# Altium PCB Filter-SK.PcbDoc
Units mm, origin at the board's own origin, x right, y up, seen from the top; angles counter-clockwise.
Board outline 84 x 44 mm, 4 copper layers (Top Layer, VCC, GND, Bottom Layer), stack 1.62 mm thick; 42 components, 20 nets, 135 pads, 150 vias.
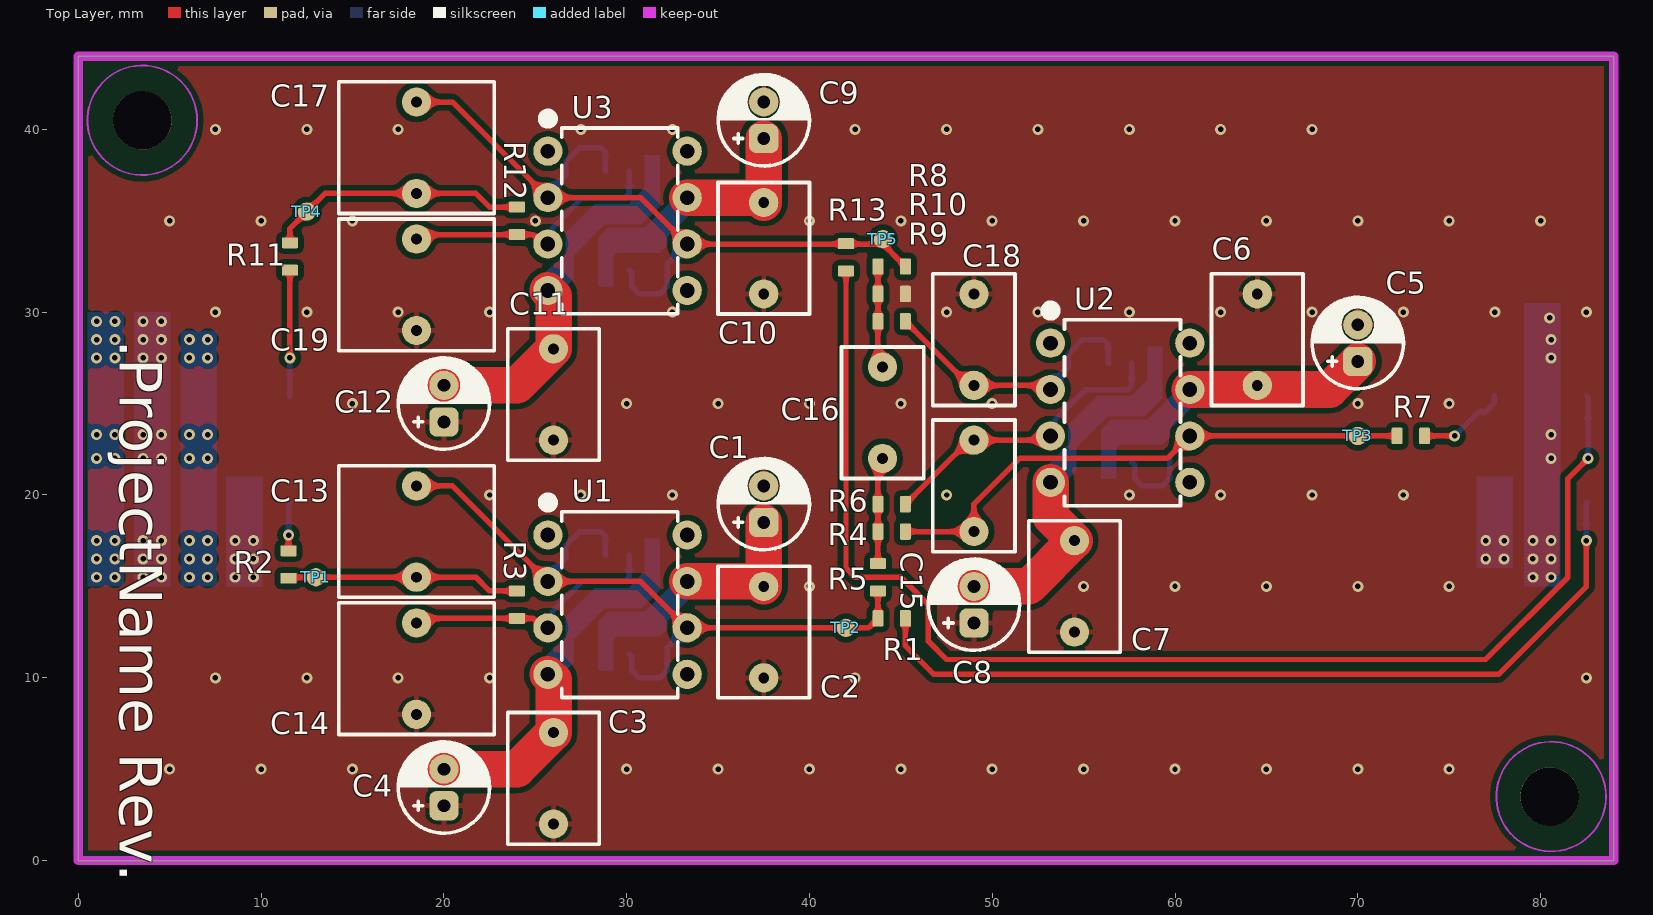
[diagram p0: Top Layer view]
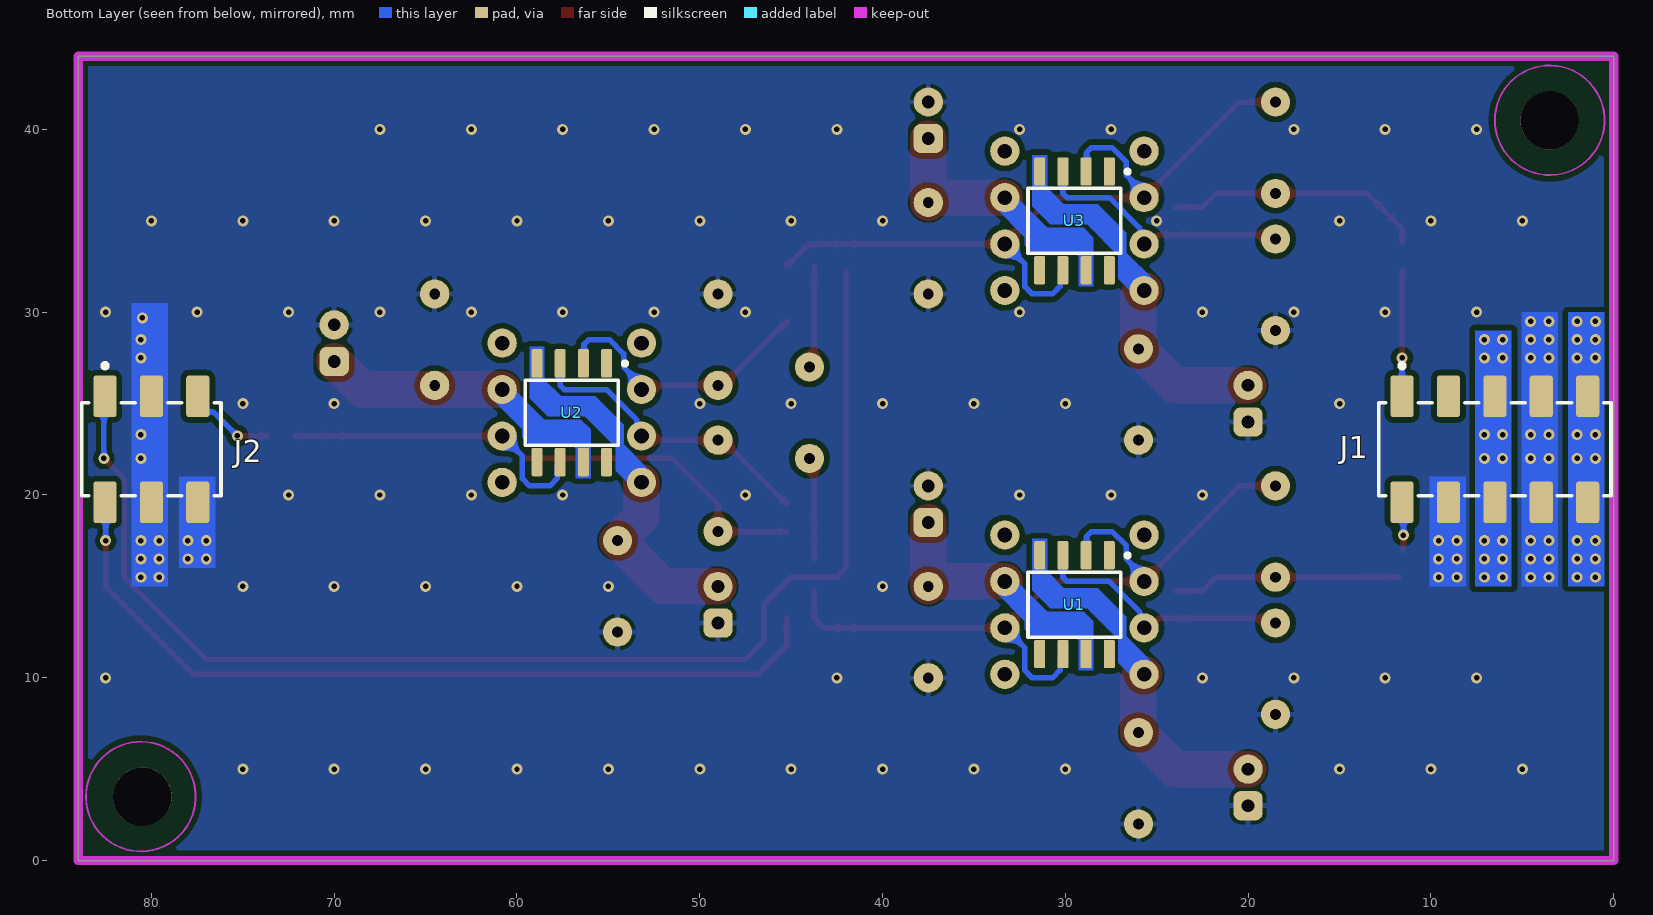
[diagram p1: Bottom Layer view, seen from below]
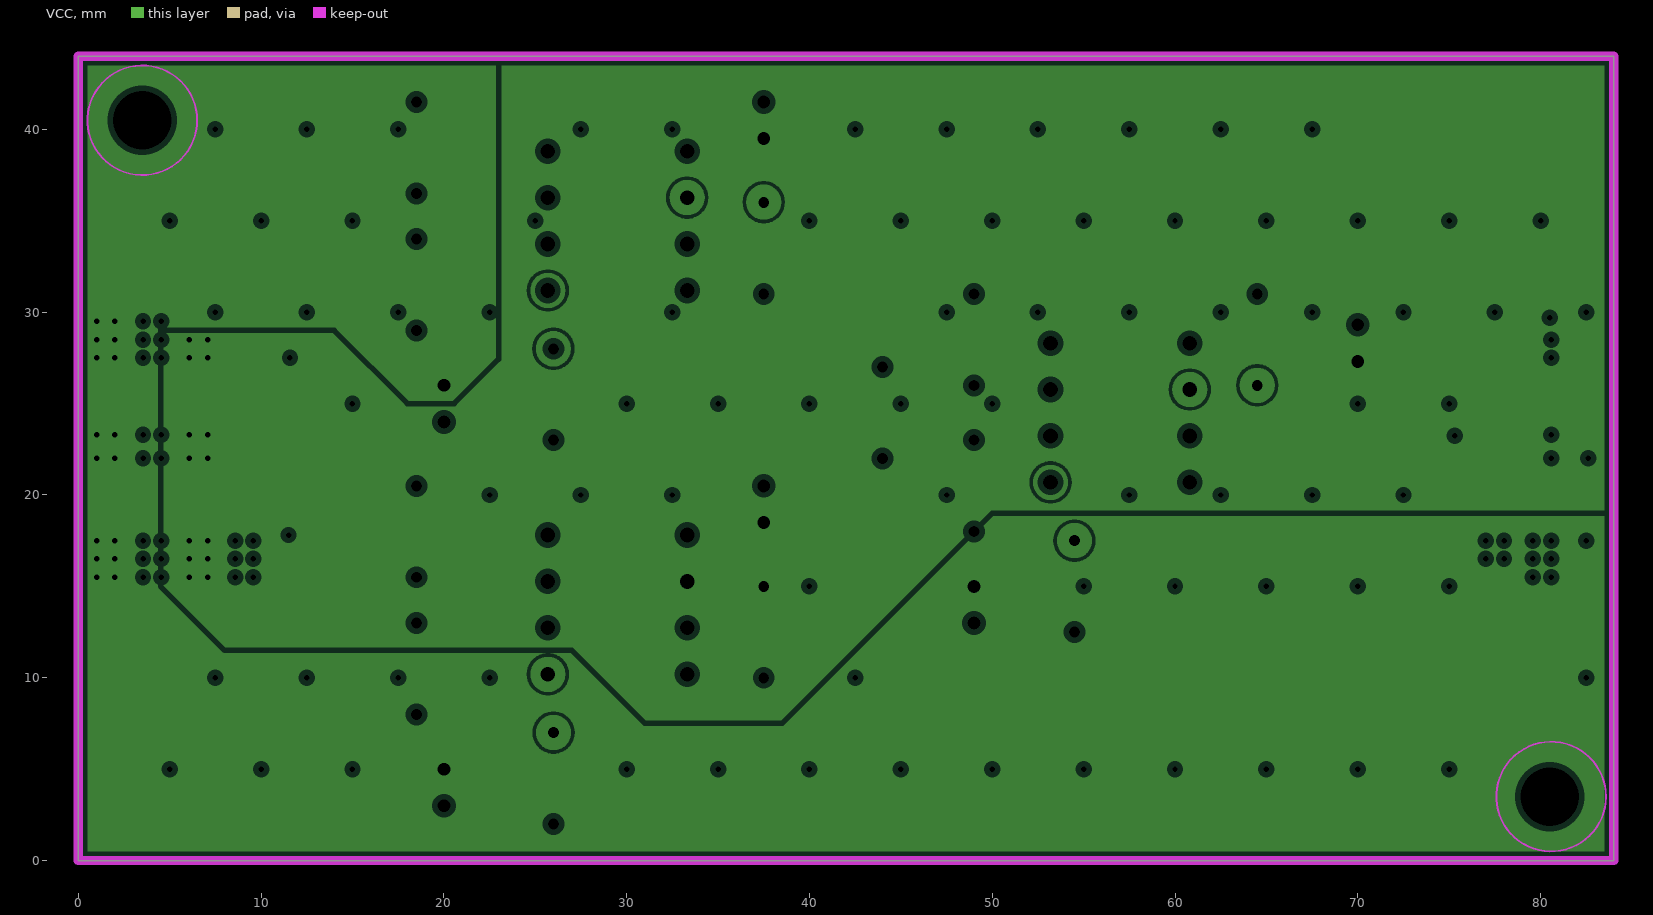
[diagram p2: VCC, clearances drawn from the general rule]
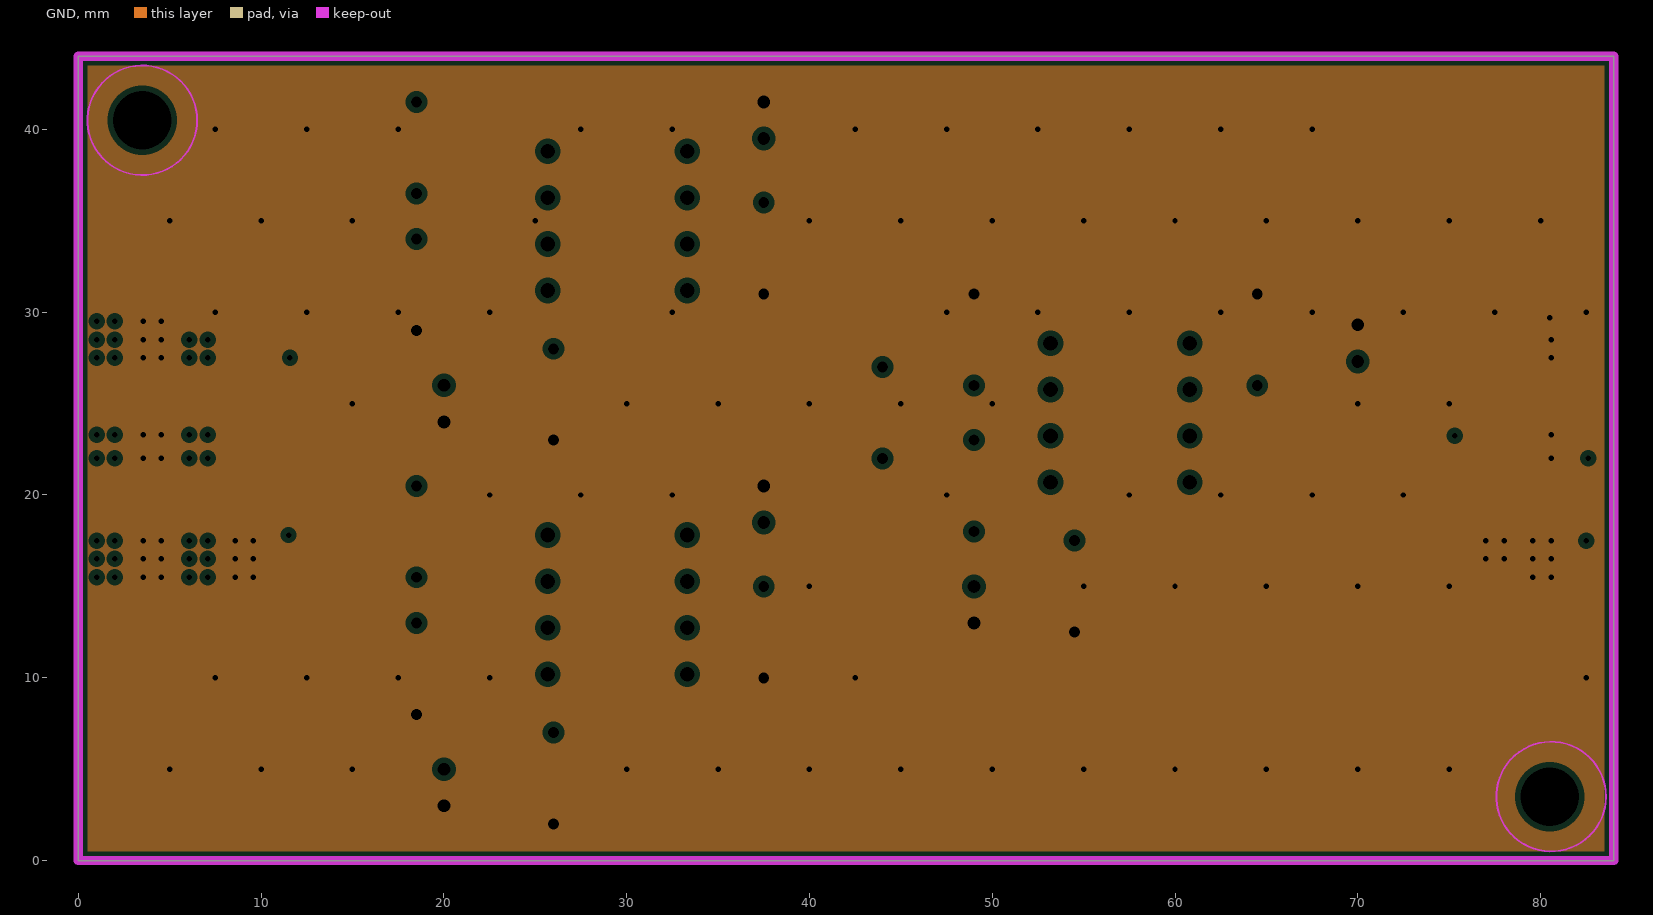
[diagram p3: GND, clearances drawn from the general rule]

## Layer stack, top to bottom
Top Solder: solder mask 0.0102, Solder Resist, Dk 3.5
Top Layer: signal copper 0.035
Dielectric 2: prepreg 0.14, PP-010, Dk 4.3
VCC: plane copper 0.035, net (Multiple Nets)
Dielectric 1: core 1.2, Core-042, Dk 4.6
GND: plane copper 0.035, net AGND
Dielectric 3: prepreg 0.14, PP-010, Dk 4.3
Bottom Layer: signal copper 0.035
Bottom Solder: solder mask 0.0102, Solder Resist, Dk 3.5

## Board outline
0,0 84,0 84,44 0,44

## Design rules (kind name [scope] priority, off if disabled: settings)
Clearance "Clearance Polygon Highspeed" [InPolygon and InNet('GND') vs InNetClass('Ethernet') or InNetClass('HDMI') or InNetClass('LVDS') or InNetClass('PCIe') or InNetClass('SATA') or InNetClass('USBO1_HS') or InNetClass('USBO1_SS') or InNetClass('USBH2_HS') or InNetClass('USBH3_HS') or InNetClass('USBH4_HS') or InNetClass('USBH4_SS')] p1: gap=0.15 ignorepadtopadclearanceinfootprint=FALSE except(0: Arc-Hole Track-Hole SMDPad-Hole THPad-Hole Via-Hole Fill-Hole Poly-Hole Region-Hole Text-Hole; 1.5: Arc-Fill Arc-Poly Arc-Region Track-Fill Track-Poly Track-Region SMDPad-Fill SMDPad-Poly SMDPad-Region THPad-Fill THPad-Poly THPad-Region Via-Fill Via-Poly Via-Region Fill-Fill Fill-Poly Fill-Region Poly-Poly Poly-Region Region-Region)
Clearance "Analog Polygon" [InNet('AGND') and InPolygon] p2: gap=0.15 ignorepadtopadclearanceinfootprint=FALSE except(0: Arc-Hole Track-Hole SMDPad-Hole THPad-Hole Via-Hole Fill-Hole Poly-Hole Region-Hole Text-Hole; 0.3: Arc-Fill Arc-Poly Arc-Region Track-Fill Track-Poly Track-Region SMDPad-Fill SMDPad-Poly SMDPad-Region THPad-Fill THPad-Poly THPad-Region Via-Fill Via-Poly Via-Region Fill-Fill Fill-Poly Fill-Region Poly-Poly Poly-Region Region-Region)
Clearance "Digital Polygon" [InNet('GND') and InPolygon] p3: gap=0.15 ignorepadtopadclearanceinfootprint=FALSE except(0: Arc-Hole Track-Hole SMDPad-Hole THPad-Hole Via-Hole Fill-Hole Poly-Hole Region-Hole Text-Hole; 0.3: Arc-Fill Arc-Poly Arc-Region Track-Fill Track-Poly Track-Region SMDPad-Fill SMDPad-Poly SMDPad-Region THPad-Fill THPad-Poly THPad-Region Via-Fill Via-Poly Via-Region Fill-Fill Fill-Poly Fill-Region Poly-Poly Poly-Region Region-Region)
Clearance "Diff Pairs" [InNetClass('Ethernet') or InNetClass('SATA') or InNetClass('HDMI') or InNetClass('PCIe') or InNetClass('LVDS')] p4: gap=0.1 ignorepadtopadclearanceinfootprint=FALSE except(1: Arc-Fill Arc-Poly Arc-Region Track-Fill Track-Poly Track-Region SMDPad-Fill SMDPad-Poly SMDPad-Region THPad-Fill THPad-Poly THPad-Region Via-Fill Via-Poly Via-Region Fill-Fill Fill-Poly Fill-Region Poly-Poly Poly-Region Region-Region)
Clearance [All] p5: gap=0.15 ignorepadtopadclearanceinfootprint=FALSE except(0: Arc-Hole Track-Hole SMDPad-Hole THPad-Hole Via-Hole Fill-Hole Poly-Hole Region-Hole Text-Hole)
ComponentClearance [All] p1: gap=0.2 collisioncheckmode=3 verticalgap=0.2 showdistances=FALSE
DiffPairsRouting Diff_Ethernet [InNetClass('Ethernet')] p1: maxlimit=2 minlimit=0.135 mostfreqgap=0.135 toplayer_minwidth=0.165 toplayer_maxwidth=0.165 toplayer_prefwidth=0.165 bottomlayer_minwidth=0.165 bottomlayer_maxwidth=0.165 bottomlayer_prefwidth=0.165 impedanceprofiledriven=TRUE impedanceprofileid={0758E92C-ECA7-4BD1-944C-2B5039B24D7F} impedanceprofilevalue=95.000000 maxuncoupledlength=12.7
DiffPairsRouting Diff_PCIe [InNetClass('PCIe')] p2: maxlimit=2 minlimit=0.16 mostfreqgap=0.16 toplayer_minwidth=0.198 toplayer_maxwidth=0.198 toplayer_prefwidth=0.198 bottomlayer_minwidth=0.198 bottomlayer_maxwidth=0.198 bottomlayer_prefwidth=0.198 impedanceprofiledriven=TRUE impedanceprofileid={872D3C10-AE81-4B26-BAE9-CD09B3029D58} impedanceprofilevalue=90.000000 maxuncoupledlength=12.7
DiffPairsRouting Diff_HDMI [InNetClass('HDMI')] p3: maxlimit=2 minlimit=0.16 mostfreqgap=0.16 toplayer_minwidth=0.198 toplayer_maxwidth=0.198 toplayer_prefwidth=0.198 bottomlayer_minwidth=0.198 bottomlayer_maxwidth=0.198 bottomlayer_prefwidth=0.198 impedanceprofiledriven=TRUE impedanceprofileid={872D3C10-AE81-4B26-BAE9-CD09B3029D58} impedanceprofilevalue=90.000000 maxuncoupledlength=12.7
DiffPairsRouting Diff_SATA [InNetClass('SATA')] p4: maxlimit=2 minlimit=0.105 mostfreqgap=0.105 toplayer_minwidth=0.165 toplayer_maxwidth=0.165 toplayer_prefwidth=0.165 bottomlayer_minwidth=0.165 bottomlayer_maxwidth=0.165 bottomlayer_prefwidth=0.165 impedanceprofiledriven=TRUE impedanceprofileid={3923B0F9-8FB3-4A4E-B013-C19AAABC556E} impedanceprofilevalue=90.000000 maxuncoupledlength=12.7
DiffPairsRouting Diff_LVDS [InNetClass('LVDS')] p5: maxlimit=2 minlimit=0.17 mostfreqgap=0.17 toplayer_minwidth=0.165 toplayer_maxwidth=0.165 toplayer_prefwidth=0.165 bottomlayer_minwidth=0.165 bottomlayer_maxwidth=0.165 bottomlayer_prefwidth=0.165 impedanceprofiledriven=TRUE impedanceprofileid={7474D7DC-58A7-4FA6-A522-E63227D1F5B1} impedanceprofilevalue=100.000000 maxuncoupledlength=12.7
DiffPairsRouting DiffPairsRouting_USB [All] p6: maxlimit=2 minlimit=0.16 mostfreqgap=0.16 toplayer_minwidth=0.1 toplayer_maxwidth=0.198 toplayer_prefwidth=0.198 bottomlayer_minwidth=0.1 bottomlayer_maxwidth=0.198 bottomlayer_prefwidth=0.198 impedanceprofiledriven=TRUE impedanceprofileid={872D3C10-AE81-4B26-BAE9-CD09B3029D58} impedanceprofilevalue=90.000000 maxuncoupledlength=12.7
FabricationTestPointUsage FabricationTestPointUsage_1 [All] p1: valid=0 allowmultiple=FALSE
FabricationTestpoint FabricationTestpoint_1 [All] p1: side=3 testpointundercomponent=TRUE minsize=1.016 maxsize=2.54 preferedsize=1.524 minholesize=0 maxholesize=1.016 preferedholesize=0.813 testpointgrid=0.025 allowsidetop=TRUE allowsidebottom=TRUE usegrid=TRUE gridtolerance=0
Height [All] p1: minheight=0 maxheight=100 prefheight=0.254
HoleSize [All] p1: absolutevalues=TRUE maxlimit=6 minlimit=0.2 maxpercent=80.000 minpercent=20.000
HoleSize FabricationTestpoint [All] p2 off: absolutevalues=TRUE maxlimit=2.54 minlimit=0.025 maxpercent=80.000 minpercent=20.000
HoleSize FabricationTestPointUsage [All] p3 off: absolutevalues=TRUE maxlimit=2.54 minlimit=0.025 maxpercent=80.000 minpercent=20.000
MatchedLengths Match_PCIe [InNetClass('PCIe')] p1: tolerance=2 checknetsindiffpair=FALSE checkdiffpairvsdiffpair=TRUE checkxsignals=TRUE checkothers=TRUE
MatchedLengths Match_PCIe_Intra [InNetClass('PCIe')] p2: tolerance=0.15 checknetsindiffpair=TRUE checkdiffpairvsdiffpair=FALSE checkxsignals=FALSE checkothers=FALSE
MatchedLengths Match_SATA [InNetClass('SATA')] p3: tolerance=2 checknetsindiffpair=FALSE checkdiffpairvsdiffpair=TRUE checkxsignals=TRUE checkothers=TRUE
MatchedLengths Match_SATA_Intra [InNetClass('SATA')] p4: tolerance=0.15 checknetsindiffpair=TRUE checkdiffpairvsdiffpair=FALSE checkxsignals=FALSE checkothers=FALSE
MatchedLengths Match_Ethernet [InNetClass('Ethernet')] p5: tolerance=2 checknetsindiffpair=FALSE checkdiffpairvsdiffpair=TRUE checkxsignals=TRUE checkothers=TRUE
MatchedLengths Match_Ethernet_Intra [InNetClass('SATA')] p6: tolerance=0.25 checknetsindiffpair=TRUE checkdiffpairvsdiffpair=FALSE checkxsignals=FALSE checkothers=FALSE
MatchedLengths Match_HDMI [InNetClass('HDMI')] p7: tolerance=2 checknetsindiffpair=FALSE checkdiffpairvsdiffpair=TRUE checkxsignals=TRUE checkothers=TRUE
MatchedLengths Match_HDMI_Intra [InNetClass('HDMI')] p8: tolerance=0.75 checknetsindiffpair=TRUE checkdiffpairvsdiffpair=FALSE checkxsignals=FALSE checkothers=FALSE
MatchedLengths Match_LVDS_Intra [InNetClass('LVDS')] p9: tolerance=0.15 checknetsindiffpair=FALSE checkdiffpairvsdiffpair=TRUE checkxsignals=TRUE checkothers=TRUE
MatchedLengths Match_USBO1_SS [InNetClass('USBO1_SS')] p10: tolerance=2 checknetsindiffpair=FALSE checkdiffpairvsdiffpair=TRUE checkxsignals=TRUE checkothers=TRUE
MatchedLengths Match_USBH4_SS [InNetClass('USBH4_SS')] p11: tolerance=2 checknetsindiffpair=FALSE checkdiffpairvsdiffpair=TRUE checkxsignals=TRUE checkothers=TRUE
MatchedLengths Match_USB_SS_Intra [InNetClass('USBO1_SS') or InNetClass('USBH4_SS')] p12: tolerance=0.15 checknetsindiffpair=TRUE checkdiffpairvsdiffpair=FALSE checkxsignals=FALSE checkothers=FALSE
MatchedLengths Match_USB_HS_Intra [InNetClass('USBO1_HS') or InNetClass('USBH2_HS') or InNetClass('USBH3_HS') or InNetClass('USBH4_HS')] p13: tolerance=1.1 checknetsindiffpair=TRUE checkdiffpairvsdiffpair=FALSE checkxsignals=FALSE checkothers=FALSE
MinimumAnnularRing [All] p1: minimumring=0.15
MinimumSolderMaskSliver [All] p1: minsoldermaskwidth=0.1
PlaneClearance [All] p1: clearance=0.3
PlaneConnect [All] p1: planeconnectstyle=Direct reliefexpansion=0.4 reliefentries=4 reliefconductorwidth=0.15 reliefairgap=0.15
PolygonConnect [All] p1: thpad.connectstyle=Relief thpad.reliefconductorwidth=0.3 thpad.reliefentries=4 thpad.polygonreliefangle="90 Angle" thpad.airgapwidth=0.2 smdpad.connectstyle=Direct smdpad.reliefconductorwidth=0.15 smdpad.reliefentries=4 smdpad.polygonreliefangle="90 Angle" smdpad.airgapwidth=0.254 via.connectstyle=Direct via.reliefconductorwidth=0.15 via.reliefentries=4 via.polygonreliefangle="90 Angle" via.airgapwidth=0.254
RoutingCorners [All] p1: cornerstyle=45-Degree minsetback=1.25 maxsetback=1.25
RoutingVias [All] p1: holewidth=0.3 width=0.6 viastyle="Through Hole" minholewidth=0.2 minwidth=0.45 maxholewidth=0.45 maxwidth=0.75
SilkToSilkClearance [All] p1: silktosilkclearance=0.1
SilkToSolderMaskClearance [IsPad] p1: minsilkscreentomaskgap=0.1 clearancetoexposedcopper=TRUE
SolderMaskExpansion [All] p1: expansion=0.075
Width [All] p1: maxlimit=10 minlimit=0.125 preferedwidth=0.15
18 further rules are at their usual default settings.

## Components (designator, comment, footprint, x,y, rotation, side; value= is the part's Value field where it differs from the comment)
C1 "10µF" CAP-5-11.5-2 37.5,19.5 r90 top
C2 "100nF" CAP_WIMA_MKP4F 37.5,12.5 r90 top
C3 "100nF" CAP_WIMA_MKP4F 26,4.5 r270 top
C4 "10µF" CAP-5-11.5-2 20,4 r90 top
C5 "10µF" CAP-5-11.5-2 70,28.31 r90 top
C6 "100nF" CAP_WIMA_MKP4F 64.5,28.5 r270 top
C7 "100nF" CAP_WIMA_MKP4F 54.5,15 r270 top
C8 "10µF" CAP-5-11.5-2 49,14 r90 top
C9 "10µF" CAP-5-11.5-2 37.5,40.5 r90 top
C10 "100nF" CAP_WIMA_MKP4F 37.5,33.5 r90 top
C11 "100nF" CAP_WIMA_MKP4F 26,25.5 r270 top
C12 "10µF" CAP-5-11.5-2 20,25 r90 top
C13 "33nF" CAP_WIMA_FKP2C 18.5,18 r90 top
C14 "22nF" CAP_WIMA_FKP2C 18.5,10.5 r270 top
C15 "1.5nF" CAP_WIMA_FKP2D 49,20.5 r90 top
C16 "2.2nF" CAP_WIMA_FKP2D 44,24.5 r90 top
C17 "33nF" CAP_WIMA_FKP2C 18.5,39 r90 top
C18 "1.5nF" CAP_WIMA_FKP2D 49,28.5 r270 top
C19 "22nF" CAP_WIMA_FKP2C 18.5,31.5 r270 top
J1 "HLE-105-02-G-DV" HLE-105-02-XXX-DV-A 6.5,22.5 r180 top
J2 "HLE-103-02-L-DV" HLE-103-02-XXX-DV 80,22.5 r180 top
R1 "0Ω" SMD0603RES 44.5,13.25 r180 top
R2 "0Ω" SMD0603RES 11.5,16.195 r90 top
R3 "22Ω" SMD0603RES 24,14 r90 top
R4 "340Ω" SMD0603RES 44.5,18 r180 top
R5 "340Ω" SMD0603RES 43.75,15.5 r270 top
R6 "200Ω" SMD0603RES 44.5,19.5 r0 top
R7 "0Ω" SMD0603RES 72.9,23.23 r180 top
R8 "340Ω" SMD0603RES 44.5,32.5 r0 top
R9 "200Ω" SMD0603RES 44.5,29.5 r0 top
R10 "340Ω" SMD0603RES 44.5,31 r180 top
R11 "0Ω" SMD0603RES 11.58,33.049 r270 top
R12 "22Ω" SMD0603RES 24,35 r90 top
R13 "0Ω" SMD0603RES 42,33 r90 top
TP1 "Testpoint" TP 13,15.5 r90 top
TP2 "Testpoint" TP 42,12.73 r90 top
TP3 "Testpoint" TP 70,23.23 r90 top
TP4 "Testpoint" TP 12.5,35.5 r90 top
TP5 "Testpoint" TP 44.02,34 r90 top
U1 "OPA1611" DIP8-SOIC8 29.5,14 r90 top
U2 "OPA1611" DIP8-SOIC8 57,24.5 r90 top
U3 "OPA1611" DIP8-SOIC8 29.5,35 r90 top

## Footprints (in the part's own frame and the unit in brackets; to place one, negate y for a bottom-side part, rotate by r counter-clockwise, add the part's x,y. Pads: shape width x height; smd on the part's side, far side on the other; paste and mask are expansions set on the pad)
CAP-5-11.5-2 [mm]
  round 1.6 hole 0.7: M(1,0)
  rrect50% 1.6x1.6 hole 0.7: P(-1,0)
  silkscreen extent -2.5,-2.5 2.5,2.5, body extent -2.5,-2.5 2.5,2.5, height 11
CAP_WIMA_FKP2C [mm] "WIMA FKP2"
  round 1.6 hole 0.6: 1(-2.5,0) 2(2.5,0)
  silkscreen extent -3.6,-4.25 3.6,4.25, body extent -3.6,-4.25 3.6,4.25, height 10
CAP_WIMA_FKP2D [mm] "WIMA FKP2"
  round 1.6 hole 0.6: 1(-2.5,0) 2(2.5,0)
  silkscreen extent -3.6,-2.25 3.6,2.25, body extent -3.6,-2.25 3.6,2.25, height 6
CAP_WIMA_MKP4F [mm] "WIMA MKP4"
  round 1.6 hole 0.6: 1(-2.5,0) 2(2.5,0)
  silkscreen extent -3.6,-2.5 3.6,2.5, body extent -3.6,-2.5 3.6,2.5, height 10
DIP8-SOIC8 [mm] "DIP-8 / SOIC-8"
  rrect25% 1.55x0.6 smd far side: 1(2.7,1.905) 2(2.7,0.635) 3(2.7,-0.635) 4(2.7,-1.905) 5(-2.7,-1.905) 6(-2.7,-0.635) 7(-2.7,0.635) 8(-2.7,1.905)
  round 1.6 hole 0.8: 1(3.81,3.81) 2(1.27,3.81) 3(-1.27,3.81) 4(-3.81,3.81) 5(-3.81,-3.81) 6(-1.27,-3.81) 7(1.27,-3.81) 8(3.81,-3.81)
  silkscreen extent -5.08,-3.3 5.84,4.06, body extent -5,-4.13 5,4.13, height 5.1
HLE-103-02-XXX-DV [mm] "Samtec HLE 6P"
  rrect25% 1.27x2.286 smd far side mask+0.051: 1(-2.54,-2.9) 2(-2.54,2.9) 3(0,-2.9) 4(0,2.9) 5(2.54,-2.9) 6(2.54,2.9)
  body extent -3.81,-3.28 3.81,3.3, height 3.66
HLE-105-02-XXX-DV-A [mm] "Samtec HLE 10P"
  rrect25% 1.27x2.286 smd far side mask+0.051: 1(-5.08,-2.9) 2(-5.08,2.9) 3(-2.54,-2.9) 4(-2.54,2.9) 5(0,-2.9) 6(0,2.9) 7(2.54,-2.9) 8(2.54,2.9) 9(5.08,-2.9) 10(5.08,2.9)
  body extent -6.35,-3.28 6.35,3.3, height 3.66
SMD0603RES [mm]
  rrect25% 0.6x0.9 smd: 1(-0.75,0) 2(0.75,0)
  body extent -0.75,-0.4 0.75,0.4, height 0.45
TP [mm]
  round 1 smd paste-1: 1(0,0)

## Part data
C1 C4 C5 C8 C9 C12: library part "Capacitor Electrolytic", "Elektrolytic Capacitor", Manufacturer Part No.=EEU-FR1H100, Voltage=50V
C2 C3 C6 C7 C10 C11: library part "Capacitor Ceramic", "Ceramic Capacitor", Manufacturer Part No.=MKP2D031001F00KF00, Voltage=100V
C13 C17: library part "Capacitor Ceramic", "Ceramic Capacitor", Manufacturer Part No.=FKP2C023301L00HFSSD, Voltage=100V
C14 C19: library part "Capacitor Ceramic", "Ceramic Capacitor", Manufacturer Part No.=FKP2D022201L00HF00, Voltage=100V
C15 C18: library part "Capacitor Ceramic", "Ceramic Capacitor", Manufacturer Part No.=FKP2D011501D00HSSD, Voltage=100V
C16: library part "Capacitor Ceramic", "Ceramic Capacitor", Manufacturer Part No.=FKP2D012201D00HSSD, Voltage=100V
J1: library part "Receptacle 5x2P", "Receptacle 5x2P", Manufacturer Part No.=HLE-105-02-G-DV
J2: library part "Receptacle 3x2P", "Receptacle 3x2P", Manufacturer Part No.=HLE-103-02-L-DV
R1 R7 R13: library part Resistor, "Resistor Thin Film", Manufacturer Part No.=TNPW060347R0BEEA
R2 R3 R11 R12: library part Resistor, "Resistor Thin Film", Manufacturer Part No.=TNPW060322R0BEEA
R4 R5 R8 R10: library part Resistor, "Resistor Thin Film", Manufacturer Part No.=TNPW0603340RBEEA
R6 R9: library part Resistor, "Resistor Thin Film", Manufacturer Part No.=TNPW0603200RBEEA
U1 U2 U3: "SoundPlus Operational Amplifier", Manufacturer Part No.=OPA1611

## Free pads (board coordinates)
  round 3.2 hole 3.2 unplated mask+1.5: ""(3.5,40.5) ""(80.5,3.5)

## Via types
v1: diameter 0.6, hole 0.3, Top Layer to Bottom Layer, tented both sides, 150 vias

## Nets (pads, with @x,y where several pads share a name; then routed paths per layer and width w, separated by ;. In a path a pad name is that pad's centre, name@x,y a point inside that pad or via, vN(x,y) a via of type N, cw(c..) or ccw(c..) an arc to the next point about the centre after c; other vN are vias at no path point)
A+12V: C1.P C2.2 C5.P C6.2 C9.P C10.2 J1.5 J1.6 U1.7 U2.7 U3.7 | length 25.4
  Top Layer w2: U1.7@33.31,15.27 37.23,15.27 C2.2 C1.P ; U3.7@33.31,36.27 37.23,36.27 C10.2 C9.P ; U2.7@60.81,25.77 68.46,25.77 C5.P
  other v1: 6.08,15.5 7.08,15.5 6.08,16.5 7.08,16.5 6.08,17.5 7.08,17.5 6.08,22 7.08,22 6.08,23.3 7.08,23.3 6.08,27.5 7.08,27.5 6.08,28.5 7.08,28.5
A-12V: C3.1 C4.M C7.1 C8.M C11.1 C12.M J1.9 J1.10 U1.4 U2.4 U3.4 | length 30.6
  Top Layer w2: C4.M 24,5 C3.1 26,9.88 U1.4@25.69,10.19 ; C12.M 24,26 C11.1 26,30.88 U3.4@25.69,31.19 ; C8.M 52,15 C7.1 53.19,18.81 U2.4@53.19,20.69
  other v1: 1,15.5 2,15.5 1,16.5 2,16.5 1,17.5 2,17.5 1,22 2,22 1,23.3 2,23.3 1,27.5 2,27.5 1,28.5 2,28.5 1,29.5 2,29.5
AGND: C1.M C2.1 C3.2 C4.P C5.M C6.1 C7.2 C8.P C9.M C10.1 C11.2 C12.P C14.2 C18.1 C19.2 J1.4 J1.7 J1.8 J2.3 J2.4 J2.6 R10.1
  other v1: 5,5 10,5 15,5 30,5 35,5 40,5 45,5 50,5 55,5 60,5 65,5 70,5 75,5 7.5,10 12.5,10 17.5,10 22.5,10 42.5,10 82.5,10 40,15 55,15 60,15 65,15 70,15 75,15 3.54,15.5 4.54,15.5 8.58,15.5 9.58,15.5 79.58,15.5 80.58,15.5 3.54,16.5 4.54,16.5 8.58,16.5 9.58,16.5 77,16.5 78,16.5 79.58,16.5 80.58,16.5 3.54,17.5 4.54,17.5 8.58,17.5 9.58,17.5 77,17.5 78,17.5 79.58,17.5 80.58,17.5 22.5,20 27.5,20 32.5,20 47.5,20 57.5,20 62.5,20 67.5,20 72.5,20 3.54,22 4.54,22 80.58,22 3.54,23.3 4.54,23.3 80.58,23.3 15,25 30,25 35,25 40,25 45,25 50,25 70,25 75,25 3.54,27.5 4.54,27.5 80.58,27.5 3.54,28.5 4.54,28.5 80.58,28.5 3.54,29.5 4.54,29.5 80.5,29.69 7.5,30 12.5,30 17.5,30 22.5,30 32.5,30 47.5,30 52.5,30 57.5,30 62.5,30 67.5,30 72.5,30 77.5,30 82.5,30 5,35 10,35 15,35 25,35 40,35 45,35 50,35 55,35 60,35 65,35 70,35 75,35 80,35 7.5,40 12.5,40 17.5,40 27.5,40 32.5,40 42.5,40 47.5,40 52.5,40 57.5,40 62.5,40 67.5,40
IN_BIAS: J1.3
IN_N: J1.2 R2.2 | length 2.8
  Top Layer w0.3: R2.2 11.58,17.025 11.5,17.105 v1(11.5,17.81)
  Bottom Layer w0.3: v1(11.5,17.81) 11.5,19.52 J1.2
IN_P: J1.1 R11.2 | length 6.9
  Top Layer w0.3: v1(11.58,27.5) R11.2
  Bottom Layer w0.3: J1.1 v1(11.58,27.5)
LP_N: C13.2 R1.2 R5.2 TP2.1 U1.2 U1.6 | length 42.2
  Top Layer w0.3: C13.2 20.46,20.5 25.69,15.27 30.77,15.27 33.31,12.73 43.23,12.73 R1.2 R5.2
  Bottom Layer w0.3: U1.2@25.69,15.27 25.69,15.526 26.664,16.5 26.664,17.225 27.44,18 28.572,18 28.835,17.737 28.835,16.73 U1.2@28.865,16.7 ; U1.6@30.135,11.3 30.285,11.15 30.285,10.42 30.705,10 31.81,10 32.21,10.4 32.21,11.63 U1.6@33.31,12.73
LP_P: C17.2 R8.2 R13.2 TP5.1 U3.2 U3.6 | length 42.6
  Top Layer w0.3: C17.2 20.46,41.5 25.69,36.27 30.77,36.27 33.31,33.73 44.02,33.73 45.05,32.7 45.2,32.7 45.25,32.65 R8.2
  Bottom Layer w0.3: U3.2@25.69,36.27 25.69,36.526 26.664,37.5 26.664,38.225 27.44,39 28.572,39 28.835,38.737 28.835,37.73 U3.2@28.865,37.7 ; U3.6@30.135,32.3 30.285,32.15 30.285,31.42 30.705,31 31.81,31 32.21,31.4 32.21,32.63 U3.6@33.31,33.73
NetC13_1: C13.1 R2.1 R3.2 TP1.1 | length 12.6
  Top Layer w0.3: R2.1@11.75,15.5 TP1.1 C13.1 21.75,15.5 22.5,14.75 R3.2
NetC14_1: C14.1 R3.1 U1.3 | length 14.7
  Top Layer w0.3: C14.1 18.798,13 19.048,13.25 R3.1 24.872,13.25 25.392,12.73 U1.3@25.69,12.73
  Bottom Layer w0.3: U1.3@25.69,12.73 25.939,12.979 25.939,13.614 27.595,15.27 29.905,15.27 30.135,15.5 U1.3@30.135,16.7
NetC15_1: C15.1 R4.1 R7.2 TP3.1 U2.6 | length 35.9
  Top Layer w0.3: R4.1 C15.1 49,19.5 51.5,22 59.58,22 60.81,23.23 TP3.1 R7.2
  Bottom Layer w0.3: U2.6@57.635,21.8 57.785,21.65 57.785,20.92 58.205,20.5 59.31,20.5 59.71,20.9 59.71,22.13 U2.6@60.81,23.23
NetC15_2: C15.2 R6.2 U2.3 | length 16.7
  Top Layer w0.3: R6.2 45.25,19.65 45.3,19.7 45.45,19.7 48.75,23 C15.2 52.662,23 52.892,23.23 U2.3@53.19,23.23
  Bottom Layer w0.3: U2.3@53.19,23.23 53.439,23.479 53.439,24.114 55.095,25.77 57.405,25.77 57.635,26 U2.3@57.635,27.2
NetC16_1: C16.1 R4.2 R5.1 R6.1 | length 5.6
  Top Layer w0.3: R5.1@43.75,16.5 R4.2 R6.1 43.75,21.452 44,21.702 C16.1
NetC16_2: C16.2 R8.1 R9.1 R10.2 | length 5.6
  Top Layer w0.3: R8.1 R10.2 R9.1 43.75,27.548 44,27.298 C16.2
NetC17_1: C17.1 R11.1 R12.2 TP4.1 | length 14.3
  Top Layer w0.3: R11.1 11.58,34.58 TP4.1 13.5,36.5 C17.1 21.75,36.5 22.5,35.75 R12.2
NetC18_2: C18.2 R9.2 U2.2 | length 15.6
  Top Layer w0.3: R9.2 45.25,29.35 45.3,29.3 45.45,29.3 48.75,26 C18.2 52.662,26 52.892,25.77 U2.2@53.19,25.77
  Bottom Layer w0.3: U2.2@53.19,25.77 53.19,26.026 54.164,27 54.164,27.725 54.94,28.5 56.072,28.5 56.335,28.237 56.335,27.23 U2.2@56.365,27.2
NetC19_1: C19.1 R12.1 U3.3 | length 14.7
  Top Layer w0.3: C19.1 18.798,34 19.048,34.25 R12.1 24.872,34.25 25.392,33.73 U3.3@25.69,33.73
  Bottom Layer w0.3: U3.3@25.69,33.73 25.939,33.979 25.939,34.614 27.595,36.27 29.905,36.27 30.135,36.5 U3.3@30.135,37.7
RCA_S: J2.5 R7.1 | length 4.9
  Top Layer w0.3: R7.1 v1(75.3,23.23)
  Bottom Layer w0.3: v1(75.3,23.23) 76.604,24.534 76.976,24.534 77.46,25.019 J2.5
XLR_N: J2.2 R1.1 | length 46
  Top Layer w0.3: R1.1 45.25,11.75 46.81,10.19 77.69,10.19 82.5,15 v1(82.5,17.5)
  Bottom Layer w0.3: v1(82.5,17.5) 82.5,19.56 J2.2
XLR_P: J2.1 R13.1 | length 71.2
  Top Layer w0.3: R13.1 42,16 42.5,15.5 45,15.5 46.5,14 46.5,12 47.5,11 77,11 81.5,15.5 81.5,20.9 v1(82.6,22)
  Bottom Layer w0.3: J2.1 82.6,25.34 v1(82.6,22)
pads on no net: U1.1 U1.5 U1.8 U2.1 U2.5 U2.8 U3.1 U3.5 U3.8

## Polygon pours and split planes (outlines as drawn)
AGND on Top Layer "AGND_L01_P014" (solid, remove dead copper, pour order 14): 0,44 0,0 84,0 84,44
no net on Top Layer "Top Layer-No Net" (solid, pour order 8): 74.46,233.6
no net on Top Layer "Top Layer-No Net 1" (solid, pour order 6): 74.6,233.738
AGND on Bottom Layer "AGND_L04_P016" (solid, remove dead copper, pour order 16): 0,44 0,0 84,0 84,44
A-12V on VCC (split plane): 26.126,7.954 26.249,7.929 26.368,7.889 26.481,7.833 26.586,7.763 26.68,7.68 26.763,7.586 26.833,7.481 26.889,7.368 26.929,7.249 26.954,7.126 26.962,7 26.954,6.874 26.929,6.751 26.889,6.632 26.833,6.519 26.763,6.414 26.68,6.32 26.586,6.237 26.481,6.167 26.368,6.111 26.249,6.071 26.126,6.046 26,6.038 25.874,6.046 25.751,6.071 25.632,6.111 25.519,6.167 25.414,6.237 25.32,6.32 25.237,6.414 25.167,6.519 25.111,6.632 25.071,6.751 25.046,6.874 25.038,7 25.046,7.126 25.071,7.249 25.111,7.368 25.167,7.481 25.237,7.586 25.32,7.68 25.414,7.763 25.519,7.833 25.632,7.889 25.751,7.929 25.874,7.954 26,7.962
A+12V on VCC (split plane): 83.49,19.151 50,19.151 49.961,19.146 49.935,19.135 49.924,19.131 49.893,19.107 38.437,7.651 31.063,7.651 27.107,11.607 27.076,11.631 27.061,11.637 27.039,11.646 27,11.651 8.063,11.651 4.651,15.063 4.651,28.849 13.937,28.849 17.893,24.893 17.924,24.869 17.961,24.854 18,24.849 20.563,24.849 20.602,24.854 20.623,24.863 20.638,24.869 20.67,24.893 23.107,27.33 23.131,27.362 23.146,27.398 23.151,27.437 23.151,43.49 83.49,43.49
A-12V on VCC (split plane): 22.849,27.5 20.5,25.151 18.063,25.151 14.107,29.107 14.076,29.131 14.061,29.137 14.039,29.146 14,29.151 4.5,29.151 4.461,29.146 4.424,29.131 4.393,29.107 4.369,29.076 4.354,29.039 4.349,29 4.349,15 4.354,14.961 4.369,14.924 4.393,14.893 7.893,11.393 7.924,11.369 7.961,11.354 8,11.349 25.596,11.349 25.538,11.345 25.389,11.315 25.244,11.266 25.108,11.199 24.981,11.114 24.866,11.014 24.766,10.899 24.681,10.772 24.614,10.636 24.565,10.491 24.535,10.342 24.525,10.19 24.535,10.038 24.565,9.889 24.614,9.744 24.681,9.608 24.766,9.481 24.866,9.366 24.981,9.266 25.108,9.181 25.244,9.114 25.389,9.065 25.538,9.035 25.69,9.025 25.842,9.035 25.991,9.065 26.136,9.114 26.272,9.181 26.399,9.266 26.514,9.366 26.614,9.481 26.699,9.608 26.766,9.744 26.815,9.889 26.845,10.038 26.855,10.19 26.845,10.342 26.815,10.491 26.766,10.636 26.699,10.772 26.614,10.899 26.514,11.014 26.399,11.114 26.272,11.199 26.136,11.266 25.991,11.315 25.842,11.345 25.784,11.349 26.937,11.349 30.893,7.393 30.924,7.369 30.961,7.354 31,7.349 38.5,7.349 38.539,7.354 38.576,7.369 38.607,7.393 50.063,18.849 83.49,18.849 83.49,0.51 0.51,0.51 0.51,43.49 22.849,43.49
A-12V on VCC (split plane): 25.816,11.144 25.939,11.119 26.058,11.079 26.171,11.023 26.276,10.953 26.37,10.87 26.453,10.776 26.523,10.671 26.579,10.558 26.619,10.439 26.644,10.316 26.652,10.19 26.644,10.064 26.619,9.941 26.579,9.822 26.523,9.709 26.453,9.604 26.37,9.51 26.276,9.427 26.171,9.357 26.058,9.301 25.939,9.261 25.816,9.236 25.69,9.228 25.564,9.236 25.441,9.261 25.322,9.301 25.209,9.357 25.104,9.427 25.01,9.51 24.927,9.604 24.857,9.709 24.801,9.822 24.761,9.941 24.736,10.064 24.728,10.19 24.736,10.316 24.761,10.439 24.801,10.558 24.857,10.671 24.927,10.776 25.01,10.87 25.104,10.953 25.209,11.023 25.322,11.079 25.441,11.119 25.564,11.144 25.69,11.152
A+12V on VCC (split plane): 26.117,28.954 26.24,28.929 26.36,28.889 26.472,28.833 26.577,28.763 26.672,28.68 26.755,28.586 26.824,28.481 26.88,28.368 26.921,28.249 26.945,28.126 26.953,28 26.945,27.874 26.921,27.751 26.88,27.632 26.824,27.519 26.755,27.414 26.672,27.32 26.577,27.237 26.472,27.167 26.36,27.111 26.24,27.071 26.117,27.046 25.991,27.038 25.866,27.046 25.743,27.071 25.623,27.111 25.511,27.167 25.406,27.237 25.311,27.32 25.228,27.414 25.158,27.519 25.103,27.632 25.062,27.751 25.038,27.874 25.03,28 25.038,28.126 25.062,28.249 25.103,28.368 25.158,28.481 25.228,28.586 25.311,28.68 25.406,28.763 25.511,28.833 25.623,28.889 25.743,28.929 25.866,28.954 25.991,28.962
A+12V on VCC (split plane): 25.816,32.144 25.939,32.119 26.058,32.079 26.171,32.023 26.276,31.953 26.37,31.87 26.453,31.776 26.523,31.671 26.579,31.558 26.619,31.439 26.644,31.316 26.652,31.19 26.644,31.064 26.619,30.941 26.579,30.822 26.523,30.709 26.453,30.604 26.37,30.51 26.276,30.427 26.171,30.357 26.058,30.301 25.939,30.261 25.816,30.236 25.69,30.228 25.564,30.236 25.441,30.261 25.322,30.301 25.209,30.357 25.104,30.427 25.01,30.51 24.927,30.604 24.857,30.709 24.801,30.822 24.761,30.941 24.736,31.064 24.728,31.19 24.736,31.316 24.761,31.439 24.801,31.558 24.857,31.671 24.927,31.776 25.01,31.87 25.104,31.953 25.209,32.023 25.322,32.079 25.441,32.119 25.564,32.144 25.69,32.152
A+12V on VCC (split plane): 53.316,21.644 53.439,21.619 53.558,21.579 53.671,21.523 53.776,21.453 53.87,21.37 53.953,21.276 54.023,21.171 54.079,21.058 54.119,20.939 54.144,20.816 54.152,20.69 54.144,20.564 54.119,20.441 54.079,20.322 54.023,20.209 53.953,20.104 53.87,20.01 53.776,19.927 53.671,19.857 53.558,19.801 53.439,19.761 53.316,19.736 53.19,19.728 53.064,19.736 52.941,19.761 52.822,19.801 52.709,19.857 52.604,19.927 52.51,20.01 52.427,20.104 52.357,20.209 52.301,20.322 52.261,20.441 52.236,20.564 52.228,20.69 52.236,20.816 52.261,20.939 52.301,21.058 52.357,21.171 52.427,21.276 52.51,21.37 52.604,21.453 52.709,21.523 52.822,21.579 52.941,21.619 53.064,21.644 53.19,21.652
A-12V on VCC (split plane): 54.626,18.454 54.749,18.429 54.868,18.389 54.981,18.333 55.086,18.263 55.18,18.18 55.263,18.086 55.333,17.981 55.389,17.868 55.429,17.749 55.454,17.626 55.462,17.5 55.454,17.374 55.429,17.251 55.389,17.132 55.333,17.019 55.263,16.914 55.18,16.82 55.086,16.737 54.981,16.667 54.868,16.611 54.749,16.571 54.626,16.546 54.5,16.538 54.374,16.546 54.251,16.571 54.132,16.611 54.019,16.667 53.914,16.737 53.82,16.82 53.737,16.914 53.667,17.019 53.611,17.132 53.571,17.251 53.546,17.374 53.538,17.5 53.546,17.626 53.571,17.749 53.611,17.868 53.667,17.981 53.737,18.086 53.82,18.18 53.914,18.263 54.019,18.333 54.132,18.389 54.251,18.429 54.374,18.454 54.5,18.462
A+12V on VCC (split plane): 60.936,26.724 61.059,26.699 61.178,26.659 61.291,26.603 61.396,26.533 61.49,26.45 61.573,26.356 61.643,26.251 61.699,26.138 61.739,26.019 61.764,25.896 61.772,25.77 61.764,25.644 61.739,25.521 61.699,25.402 61.643,25.289 61.573,25.184 61.49,25.09 61.396,25.007 61.291,24.937 61.178,24.881 61.059,24.841 60.936,24.816 60.81,24.808 60.684,24.816 60.561,24.841 60.442,24.881 60.329,24.937 60.224,25.007 60.13,25.09 60.047,25.184 59.977,25.289 59.921,25.402 59.881,25.521 59.856,25.644 59.848,25.77 59.856,25.896 59.881,26.019 59.921,26.138 59.977,26.251 60.047,26.356 60.13,26.45 60.224,26.533 60.329,26.603 60.442,26.659 60.561,26.699 60.684,26.724 60.81,26.732
A+12V on VCC (split plane): 33.436,37.224 33.559,37.199 33.678,37.159 33.791,37.103 33.896,37.033 33.99,36.95 34.073,36.856 34.143,36.751 34.199,36.638 34.239,36.519 34.264,36.396 34.272,36.27 34.264,36.144 34.239,36.021 34.199,35.902 34.143,35.789 34.073,35.684 33.99,35.59 33.896,35.507 33.791,35.437 33.678,35.381 33.559,35.341 33.436,35.316 33.31,35.308 33.184,35.316 33.061,35.341 32.942,35.381 32.829,35.437 32.724,35.507 32.63,35.59 32.547,35.684 32.477,35.789 32.421,35.902 32.381,36.021 32.356,36.144 32.348,36.27 32.356,36.396 32.381,36.519 32.421,36.638 32.477,36.751 32.547,36.856 32.63,36.95 32.724,37.033 32.829,37.103 32.942,37.159 33.061,37.199 33.184,37.224 33.31,37.232
A+12V on VCC (split plane): 64.626,26.954 64.749,26.929 64.868,26.889 64.981,26.833 65.086,26.763 65.18,26.68 65.263,26.586 65.333,26.481 65.389,26.368 65.429,26.249 65.454,26.126 65.462,26 65.454,25.874 65.429,25.751 65.389,25.632 65.333,25.519 65.263,25.414 65.18,25.32 65.086,25.237 64.981,25.167 64.868,25.111 64.749,25.071 64.626,25.046 64.5,25.038 64.374,25.046 64.251,25.071 64.132,25.111 64.019,25.167 63.914,25.237 63.82,25.32 63.737,25.414 63.667,25.519 63.611,25.632 63.571,25.751 63.546,25.874 63.538,26 63.546,26.126 63.571,26.249 63.611,26.368 63.667,26.481 63.737,26.586 63.82,26.68 63.914,26.763 64.019,26.833 64.132,26.889 64.251,26.929 64.374,26.954 64.5,26.962
A+12V on VCC (split plane): 37.626,36.975 37.749,36.95 37.868,36.91 37.981,36.854 38.086,36.784 38.18,36.701 38.263,36.607 38.333,36.502 38.389,36.389 38.429,36.27 38.454,36.147 38.462,36.021 38.454,35.896 38.429,35.772 38.389,35.653 38.333,35.54 38.263,35.435 38.18,35.341 38.086,35.258 37.981,35.188 37.868,35.132 37.749,35.092 37.626,35.067 37.5,35.059 37.374,35.067 37.251,35.092 37.132,35.132 37.019,35.188 36.914,35.258 36.82,35.341 36.737,35.435 36.667,35.54 36.611,35.653 36.571,35.772 36.546,35.896 36.538,36.021 36.546,36.147 36.571,36.27 36.611,36.389 36.667,36.502 36.737,36.607 36.82,36.701 36.914,36.784 37.019,36.854 37.132,36.91 37.251,36.95 37.374,36.975 37.5,36.983
AGND on GND (split plane): 83.49,0.51 0.51,0.51 0.51,43.49 83.49,43.49

## Keep-outs
Keep-Out Layer:
  circle w0.1: c3.5,40.5 r3
  circle w0.1: c80.58,3.5 r3
  lines w0.5: 0,0 84,0 84,44 0,44 0,0

## Other copper
Bottom Layer:
  region net AGND: 10.08,21 8.08,21 8.08,15 10.08,15
  region net AGND: 78.5,21 76.5,21 76.5,16 78.5,16
  rectangle net AGND: 79.08,15 81.08,30.5
  rectangle net A+12V: 5.58,15 7.58,29
  rectangle net AGND: 3.04,15 5.04,30
  rectangle net A-12V: 0.5,15 2.5,30
  region net A-12V: 59.3,28.1 58.5,28.1 58.5,26.315 57.585,25.4 55.715,25.4 54.164,23.85 54.164,22.764 52.7,21.3 52.7,20.92 53.12,20.5 53.782,20.5 54.6,21.318 54.6,22.6 56.3,24.3 58.32,24.3 59.31,25.29
  region net A+12V: 56.779,20.92 56.779,22.549 56.994,22.764 59.31,22.764 59.71,23.164 59.71,23.6 61.4,25.29 60.375,26.315 60.3,26.315 60.3,25.914 58.5,24.114 56.5,24.114 55.972,23.586 55.972,20.92
  region net A-12V: 31.8,17.6 31,17.6 31,15.815 30.085,14.9 28.215,14.9 26.664,13.35 26.664,12.264 25.2,10.8 25.2,10.42 25.62,10 26.282,10 27.1,10.818 27.1,12.1 28.8,13.8 30.82,13.8 31.81,14.79
  region net A+12V: 29.279,10.42 29.279,12.049 29.494,12.264 31.81,12.264 32.21,12.664 32.21,13.1 33.9,14.79 32.875,15.815 32.8,15.815 32.8,15.414 31,13.614 29,13.614 28.472,13.086 28.472,10.42
  region net A+12V: 29.279,31.42 29.279,33.049 29.494,33.264 31.81,33.264 32.21,33.664 32.21,34.1 33.9,35.79 32.875,36.815 32.8,36.815 32.8,36.414 31,34.614 29,34.614 28.472,34.086 28.472,31.42
  region net A-12V: 31.8,38.6 31,38.6 31,36.815 30.085,35.9 28.215,35.9 26.664,34.35 26.664,33.264 25.2,31.8 25.2,31.42 25.62,31 26.282,31 27.1,31.818 27.1,33.1 28.8,34.8 30.82,34.8 31.81,35.79
VCC (plane layer: these items are gaps in the copper):
  circle w0.2: c25.991,28 r1.062
  circle w0.2: c25.69,31.19 r1.062
  circle w0.2: c37.5,36.021 r1.062
  circle w0.2: c33.31,36.27 r1.062
  circle w0.2: c64.5,26 r1.062
  circle w0.2: c60.81,25.77 r1.062
  circle w0.2: c53.19,20.69 r1.062
  circle w0.2: c54.5,17.5 r1.062
  circle w0.2: c25.69,10.19 r1.062
  circle w0.2: c26,7 r1.062
  lines w0.3: 23,44 23,27.437 20.563,25 18,25 14,29 4.5,29 4.5,15 8,11.5 27,11.5 31,7.5 38.5,7.5 50,19 84,19

## Silkscreen, mask and mechanical layers (free items; w line width, h text height)
Top Overlay:
  text ".ProjectName Rev. .Revision" at 1.5,28.5 h4 r270
Top Solder:
  text "B" at 73,42.5 h10 r270
Mechanical 1:
  the board outline again, w0.1